# Altium PCB PCB1.PcbDoc
Units mil, origin at the board's own origin, x right, y up, seen from the top; angles counter-clockwise.
Board outline 2070 x 1705.94 mil, 2 copper layers (Top Layer, Bottom Layer); 70 components, 83 nets, 239 pads, 20 vias.
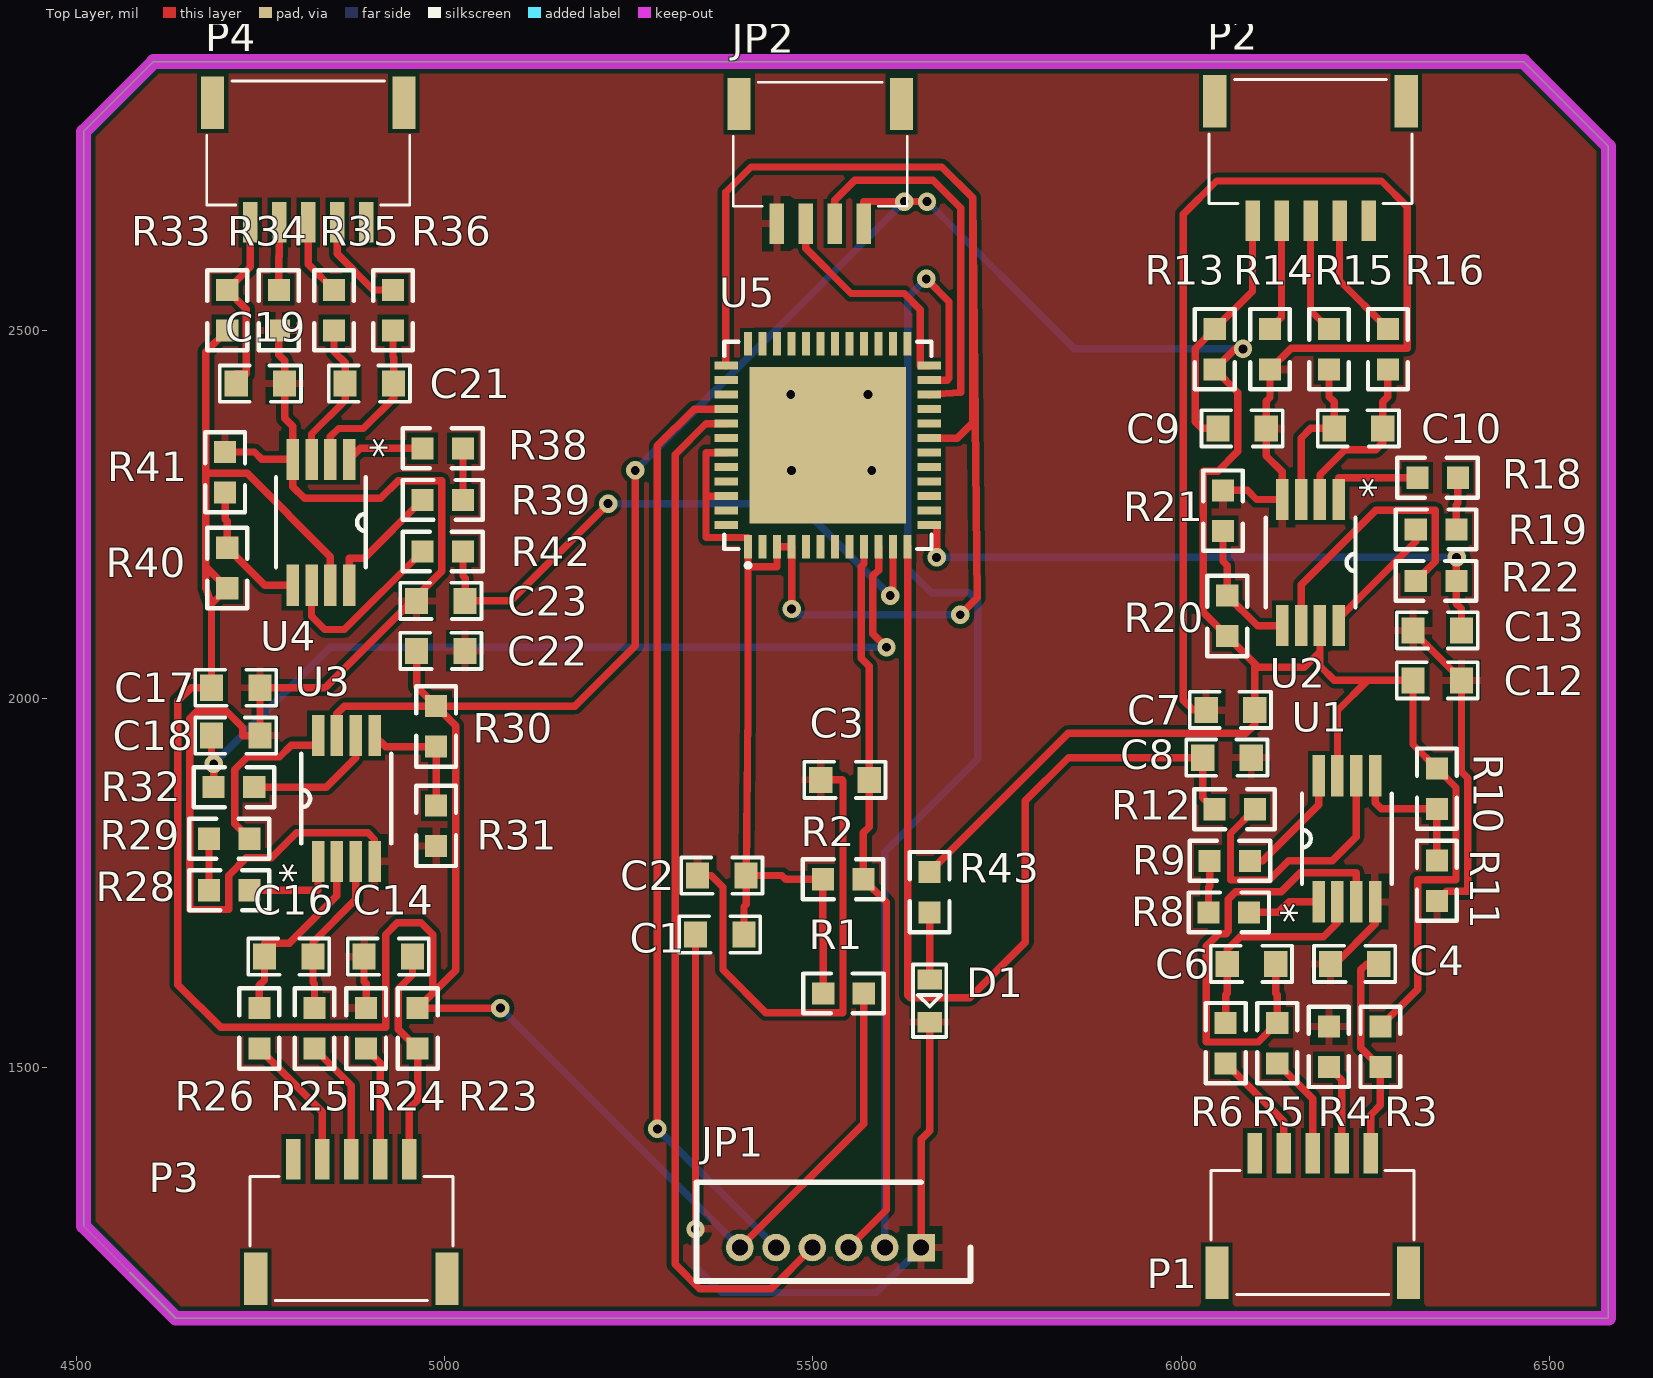
[diagram p0: Top Layer view]
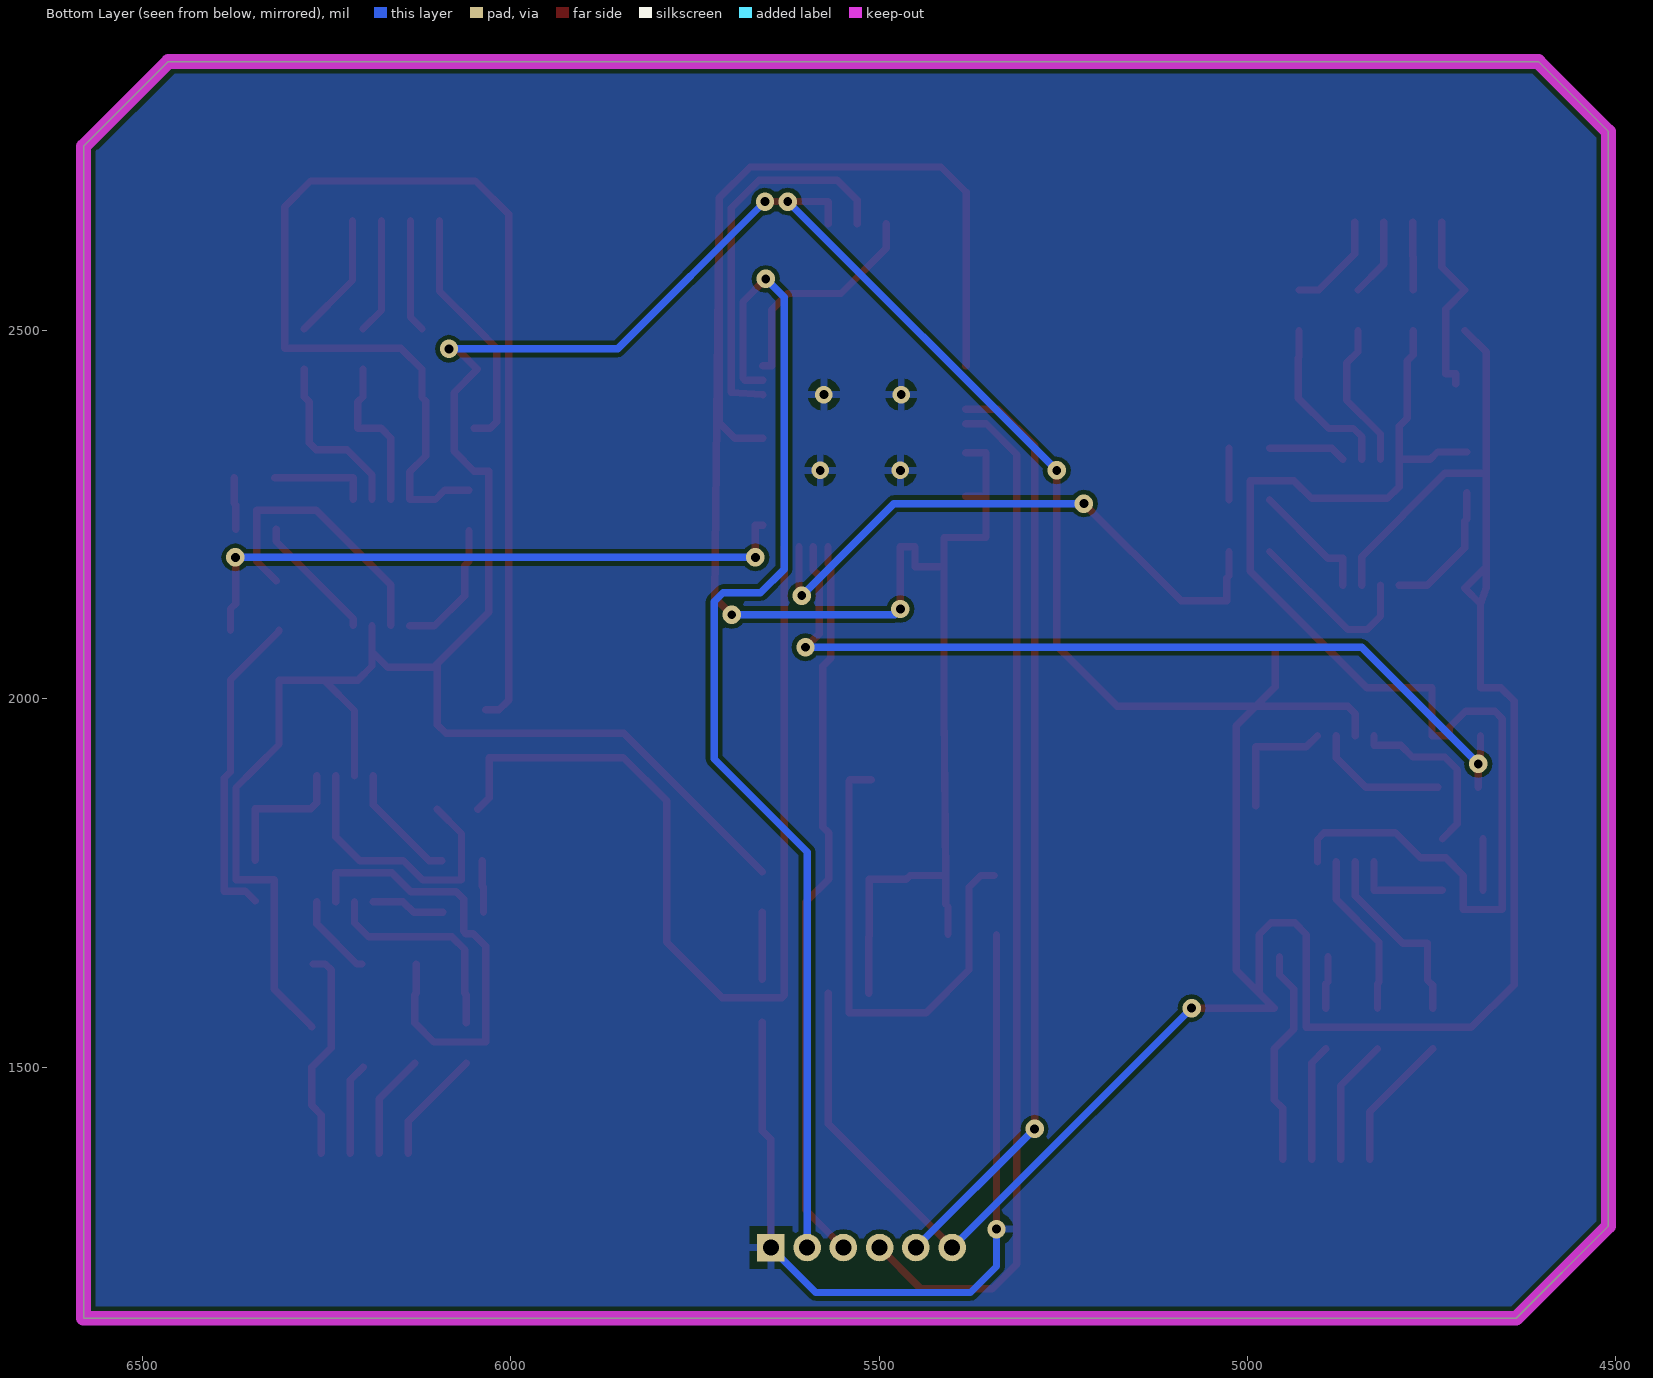
[diagram p1: Bottom Layer view, seen from below]
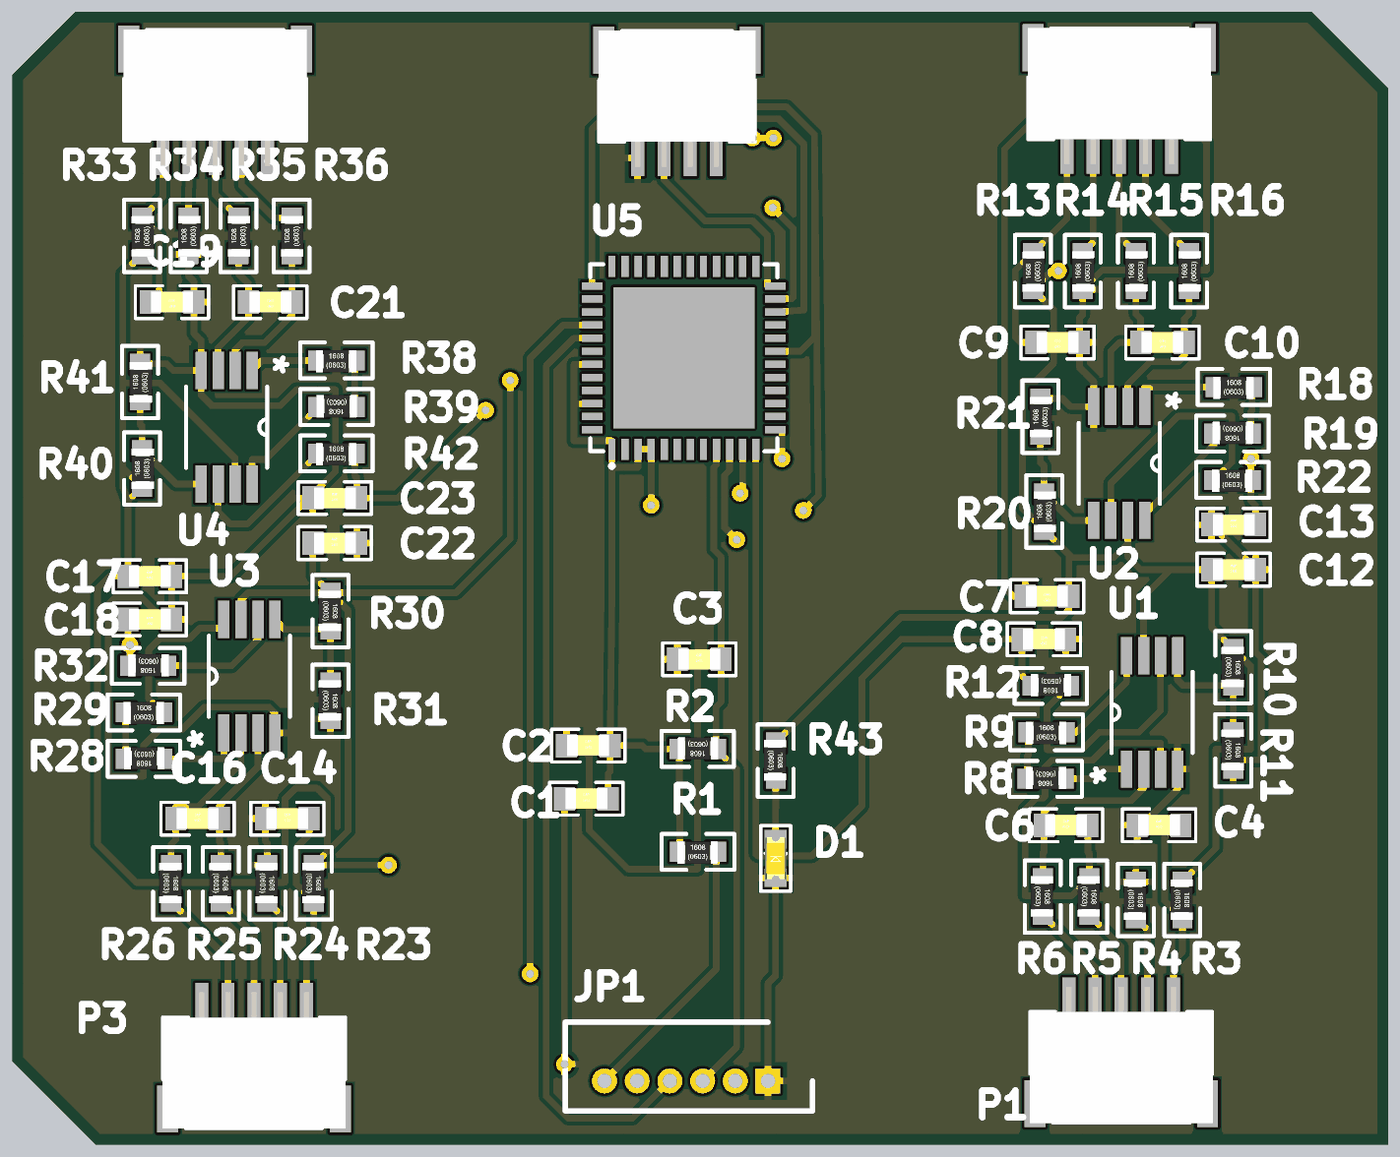
[diagram p2: 3D render of the assembled board from above, using the file's embedded part models]

## Layer stack, top to bottom
Top Solder: solder mask 0.4, Solder Resist, Dk 3.5
Top Layer: signal copper 1.4
Dielectric 1: dielectric 12.6, FR-4, Dk 4.8
Bottom Layer: signal copper 1.4
Bottom Solder: solder mask 0.4, Solder Resist, Dk 3.5

## Board outline
4510,1284.06 4510,1385 4510,2770 4605,2865 6465,2865 6580,2750 6580,1159.06 4635,1159.06

## Design rules (kind name [scope] priority, off if disabled: settings)
Clearance [All] p1: gap=6 ignorepadtopadclearanceinfootprint=FALSE
HoleToHoleClearance [All] p1: gap=0 allowstackedmicrovias=TRUE
MinimumSolderMaskSliver [All] p1: minsoldermaskwidth=0
PolygonConnect [All] p1: connectstyle=Relief reliefconductorwidth=10 reliefentries=4 polygonreliefangle="90 Angle" airgapwidth=10
RoutingVias [All] p1: holewidth=12 width=25 viastyle="Through Hole" minholewidth=6 minwidth=12 maxholewidth=28 maxwidth=50
SilkToSilkClearance [All] p1: silktosilkclearance=0
SilkToSolderMaskClearance [IsPad] p1: minsilkscreentomaskgap=0 clearancetoexposedcopper=TRUE
SolderMaskExpansion [All] p1: expansion=4
Width [All] p1: maxlimit=10 minlimit=10 preferedwidth=10
26 further rules are at their usual default settings.

## Components (designator, comment, footprint, x,y, rotation, side; value= is the part's Value field where it differs from the comment)
C1 "10uF" 0603C 5373.54,1680 r0 top
C2 "100nF" 0603C 5376.44,1760 r0 top
C3 "1uF" 0603C 5543.54,1890 r0 top
C4 "Cb" 0603C 6235.46,1640 r0 top value=0.1uF
C6 "Cb" 0603C 6095.46,1640 r0 top value=1nF
C7 "Cb" 0603C 6066.89,1985 r180 top value=0.1uF
C8 "Cb" 0603C 6062.2,1920 r180 top value=2.2uF
C9 "Cb" 0603C 6082.72,2367.12 r180 top value=0.1uF
C10 "Cb" 0603C 6240.63,2367.12 r180 top value=1nF
C12 "Cb" 0603C 6347.72,2025 r0 top value=0.1uF
C13 "Cb" 0603C 6347.72,2092.87 r0 top value=2.2uF
C14 "Cb" 0603C 4923.54,1650 r0 top value=0.1uF
C16 "Cb" 0603C 4788.54,1650 r0 top value=1nF
C17 "Cb" 0603C 4716.61,2015 r0 top value=0.1uF
C18 "Cb" 0603C 4716.61,1950 r180 top value=2.2uF
C19 "Cb" 0603C 4750,2427.88 r180 top value=0.1uF
C21 "Cb" 0603C 4897.91,2427.88 r180 top value=1nF
C22 "Cb" 0603C 4995,2065 r0 top value=0.1uF
C23 "Cb" 0603C 4995,2132.87 r0 top value=2.2uF
D1 "LED0603" 0603Led 5658.54,1590 r90 top value=Color
JP1 "SPI1" SHDR6 5646.96,1255 r180 top
JP2 "SH_1.0MM_4P" SH_1.0MM_4P 5510.1,2753.27 r0 top
P1 "SH_1.0MM_5P" SH_1.0MM_5P 6178.54,1275 r180 top
P2 "SH_1.0MM_5P" SH_1.0MM_5P 6175.63,2757.12 r0 top
P3 "SH_1.0MM_5P" SH_1.0MM_5P 4873.54,1266.73 r180 top
P4 "SH_1.0MM_5P" SH_1.0MM_5P 4815,2755 r0 top
R1 "0Ω (0R0) ±1%" 0603R 5514.16,1600 r0 top
R2 "10K" 0603R 5568.54,1755 r180 top
R3 "Rb" 0603R 6270.47,1555 r270 top value=0R
R4 "Rb" 0603R 6200.46,1555 r270 top value=0R
R5 "Rb" 0603R 6130.45,1560 r270 top value=0R
R6 "Rb" 0603R 6060.44,1560 r270 top value=0R
R8 "Rb" 0603R 6092.2,1710 r180 top value=51R
R9 "Rb" 0603R 6038.67,1780.01 r0 top value=51R
R10 "Rb" 0603R 6347.2,1905.51 r270 top value=None
R11 "Rb" 0603R 6347.2,1780.5 r270 top value=0R
R12 "Rb" 0603R 6100,1850.02 r180 top value=1K
R13 "Rb" 0603R 6045.63,2447.12 r90 top value=0R
R14 "Rb" 0603R 6120.63,2447.12 r90 top value=0R
R15 "Rb" 0603R 6200.63,2447.12 r90 top value=0R
R16 "Rb" 0603R 6280.63,2447.12 r90 top value=0R
R18 "Rb" 0603R 6320.63,2300 r0 top value=51R
R19 "Rb" 0603R 6373.54,2230 r180 top value=51R
R20 "Rb" 0603R 6062.55,2085 r90 top value=NONE
R21 "Rb" 0603R 6056.89,2227.87 r90 top value=0R
R22 "Rb" 0603R 6318.54,2159.99 r0 top value=1k
R23 "Rb" 0603R 4963.55,1580 r270 top value=0R
R24 "Rb" 0603R 4893.54,1580 r270 top value=0R
R25 "Rb" 0603R 4823.53,1580 r270 top value=0R
R26 "Rb" 0603R 4748.54,1580 r270 top value=0R
R28 "Rb" 0603R 4735.28,1740 r180 top value=51
R29 "Rb" 0603R 4680.28,1810 r0 top value=51
R30 "Rb" 0603R 4988.54,1990 r270 top value=none
R31 "Rb" 0603R 4988.54,1855 r270 top value=0R
R32 "Rb" 0603R 4741.61,1880 r180 top value=1K
R33 "Rb" 0603R 4705,2500 r90 top value=0R
R34 "Rb" 0603R 4775,2500 r90 top value=0R
R35 "Rb" 0603R 4850,2500 r90 top value=0R
R36 "Rb" 0603R 4930,2500 r90 top value=0R
R38 "Rb" 0603R 4970,2340.01 r0 top value=51R
R39 "Rb" 0603R 5025,2270 r180 top value=51R
R40 "Rb" 0603R 4705,2150 r90 top value=NONE
R41 "Rb" 0603R 4702.09,2280 r90 top value=0R
R42 "Rb" 0603R 4970,2199.99 r0 top value=1K
R43 "Rb" 0603R 5658.54,1765 r270 top value=10K
U1 "INA333_DGK_8" VSSOP-8 6225,1810 r90 top value=Value
U2 "INA333_DGK_8" VSSOP-8 6175.63,2185 r270 top value=Value
U3 "INA333_DGK_8" VSSOP-8 4866.61,1864.5 r90 top value=Value
U4 "INA333_DGK_8" VSSOP-8 4832.2,2239.5 r270 top value=Value
U5 "ESP32-PICO-D4" PICO 5520.31,2355 r0 top

## Footprints (in the part's own frame and the unit in brackets; to place one, negate y for a bottom-side part, rotate by r counter-clockwise, add the part's x,y. Pads: shape width x height; smd on the part's side, far side on the other; paste and mask are expansions set on the pad)
0603C [mm]
  rect 0.8x0.9 smd: 1(-0.836,0) 2(0.836,0)
  silkscreen extent -1.4,-0.62 1.4,0.62, body extent -0.8,-0.4 0.8,0.4, height 0.73
0603Led [mm] "0603贴?"
  rect 0.7x0.85 smd: 1(-0.736,0) 2(0.736,0)
  silkscreen extent -1.25,-0.57 1.25,0.58, body extent -0.81,-0.4 0.81,0.4, height 0.62
0603R [mil]
  rect 30x30 smd: 1(0,0) 2(55,0)
  silkscreen extent -27,-27 82,27, body extent -4,-18 58,16, height 18
PICO [mm]
  rect 0.28x0.8 smd: 1(-2.75,-3.778) 2(-2.25,-3.778) 3(-1.75,-3.778) 4(-1.25,-3.778) 5(-0.75,-3.778) 6(-0.25,-3.778) 7(0.25,-3.778) 8(0.75,-3.778) 9(1.25,-3.778) 10(1.75,-3.778) 11(2.25,-3.778) 12(2.75,-3.778) 25(2.75,3.222) 26(2.25,3.222) 27(1.75,3.222) 28(1.25,3.222) 29(0.75,3.222) 30(0.25,3.222) 31(-0.25,3.222) 32(-0.75,3.222) 33(-1.25,3.222) 34(-1.75,3.222) 35(-2.25,3.222) 36(-2.75,3.222)
  rect 0.8x0.28 smd: 13(3.5,-3.027) 14(3.5,-2.527) 15(3.5,-2.027) 16(3.5,-1.527) 17(3.5,-1.027) 18(3.5,-0.527) 19(3.5,-0.027) 20(3.5,0.473) 21(3.5,0.973) 22(3.5,1.473) 23(3.5,1.973) 24(3.5,2.473) 37(-3.5,2.473) 38(-3.5,1.972) 39(-3.5,1.473) 40(-3.5,0.972) 41(-3.5,0.473) 42(-3.5,-0.028) 43(-3.5,-0.527) 44(-3.5,-1.028) 45(-3.5,-1.527) 46(-3.5,-2.028) 47(-3.5,-2.527) 48(-3.5,-3.028)
  rect 5.4x5.4 smd: 49(0,-0.278)
  silkscreen extent -3.58,-4.49 3.58,3.3
SH_1.0MM_4P [mm]
  rect 0.8x1.8 smd: 0(-2.8,1.375) 0(2.8,1.375)
  rect 0.5x1.4 smd: 1(-1.5,-2.75) 2(-0.5,-2.75) 3(0.5,-2.75) 4(1.5,-2.75)
  silkscreen extent -3,-2.15 3,2.13, body extent -3,-3.09 3,2.12, height 3.02
SH_1.0MM_5P [mm]
  rect 0.8x1.8 smd: 0(-3.3,1.375) 0(3.3,1.375)
  rect 0.5x1.4 smd: 1(-2,-2.75) 2(-1,-2.75) 3(0,-2.75) 4(1,-2.75) 5(2,-2.75)
  silkscreen extent -3.5,-2.15 3.5,2.13, body extent -3.5,-3.09 3.5,2.13, height 3.02
SHDR6 [mm]
  rect 0.95x0.95 hole 0.55: 1(0,0)
  round 0.95 hole 0.55: 2(1.25,0) 3(2.5,0) 4(3.75,0) 5(5,0) 6(6.25,0)
  silkscreen extent -1.7,-2.25 7.75,1.15
VSSOP-8 [mil]
  rect 56x17 smd: 1(-85.5,38.39) 2(-85.5,12.8) 3(-85.5,-12.8) 4(-85.5,-38.39) 5(85.5,-38.39) 6(85.5,-12.8) 7(85.5,12.8) 8(85.5,38.39)
  silkscreen extent -61,-61 61,61

## Part data
C1: SuppliersPartNumber=C19702, ComponentLink1Description=供应商链接, ComponentLink1URL=http://www.szlcsc.com/product/details_20411.html, Supplier=LC
C2: SuppliersPartNumber=C14663, ComponentLink1Description=供应商链接, ComponentLink1URL=http://www.szlcsc.com/product/details_15331.html, Supplier=LC
C3: SuppliersPartNumber=C15849, ComponentLink1Description=供应商链接, ComponentLink1URL=http://www.szlcsc.com/product/details_16531.html, Supplier=LC
C4 C6 C7 C8 C9 C10 C12 C13 C14 C16 C17 C18 C19 C21 C22 C23: library part Cap0603
JP1: library part "HEADER 6"
R1: SuppliersPartNumber=C21189, ComponentLink1Description=供应商链接, ComponentLink1URL=http://www.szlcsc.com/product/details_21903.html, Supplier=LC
R2: SuppliersPartNumber=C25804, ComponentLink1Description=供应商链接, ComponentLink1URL=http://www.szlcsc.com/product/details_26547.html, Supplier=LC
R3 R4 R5 R6 R8 R9 R10 R11 R12 R13 R14 R15 R16 R18 R19 R20 R21 R22 R23 R24 R25 R26 R28 R29 R30 R31 R32 R33 R34 R35 R36 R38 R39 R40 R41 R42 R43: library part Res0603
U1 U2 U3 U4: "Imported", Manufacturer="Texas Instruments", Manufacturer_Part_Number=ina333_dgk_8, PACKAGE_DESIGNATOR=DGK, Datasheet URL=http://www.ti.com/lit/gpn/INA333, FAMILY_NAME="SINGLE SUPPLY", GENERIC_PART_NUMBER=INA333, INDUSTRY_STD_PKG_TYPE=MSOP, PIN_COUNT=8, RefDes=RefDes, Type=DEV, Vendor="Texas Instruments"
JP2 P1 P2 P3 P4: LatestRevisionDate=17-Jul-2002, LatestRevisionNote="Re-released for DXP Platform.", Publisher="Altium Limited"

## Via types
v1: diameter 25, hole 12, Top Layer to Bottom Layer, 16 vias
v2: diameter 23.62/23.62 (per signal layer), hole 12, Top Layer to Bottom Layer, 4 vias

## Nets (pads, with @x,y where several pads share a name; then routed paths per layer and width w, separated by ;. In a path a pad name is that pad's centre, name@x,y a point inside that pad or via, vN(x,y) a via of type N, cw(c..) or ccw(c..) an arc to the next point about the centre after c; other vN are vias at no path point)
EN: C3.2 JP1.3 R2.1 U5.9 | length 995.1
  Top Layer w10: JP1.3 5600,1306.46 5600,1723.54 R2.1 5568.54,1818 5576.44,1825.91 C3.2 5576.44,2044 5565.5,2054.94 5565.5,2179.5 5569.53,2183.53 U5.9
FLASH_CLK: U5.31
FLASH_CS: U5.25
FLASH_SD0: U5.27
FLASH_SD1: U5.33
FLASH_SD2: U5.30
FLASH_SD3: U5.32
GND: C1.1 C2.1 C3.1 C4.1 C7.2 C8.1 C9.1 C12.2 C13.1 C14.1 C17.2 C18.1 C19.1 C22.2 C23.1 D1.1 JP1.1 JP2.1 R4.1 R11.2 R14.1 R21.2 R24.1 R31.2 R34.1 R41.2 U1.4 U2.4 U3.4 U4.4 U5.49 | length 5875.7
  Top Layer w10: R41.2 4742,2335 4752,2325 U4.4 ; R34.1 4775,2466.91 4782.91,2459 C19.1 4782.91,2380.91 4793.82,2370 U4.4 ; C14.1 4890.63,1615.91 4893.54,1613 R24.1 ; U3.4 4905,1809 4896,1818 4799,1818 4765,1784 4731,1784 4707,1760 4707,1714 4654,1714 4654,1973 4664,1983 4704,1983 4726,1961 4726,1950 C18.1 C17.2 4838,2015 4996,2173 4996,2296 4937,2296 4913,2272 4809.82,2272 4793.82,2288 U4.4 ; v1(5340.63,1280) C1.1 ; C2.1 5362,1760 5378,1744 5378,1632 5436,1574 5541,1574 5541,1889 5540,1890 C3.1 ; JP1.1 5646.96,1402 5658.53,1413.57 D1.1 ; C7.2 6016,1985 6003,1998 6003,2658 6048,2703 6272,2703 6307,2668 6307,2476 6149.51,2476 R14.1 6120.63,2409 6115.63,2404 C9.1 6115.63,2329.61 6137.24,2308 U2.4 6102.37,2270.5 6090,2282.87 R21.2 ; C4.1 6209,1640 6263.39,1694.39 U1.4 ; C13.1 6314.82,2091.81 6380.63,2026 C12.2 6380.63,1901.08 6389.2,1892.51 6389.2,1738.5 6360.2,1738.5 R11.2
  Bottom Layer w10: v1(5340.63,1280) 5340.63,1229.37 5376,1194 5585.96,1194 JP1.1
  other v2: 5471.11,2310 5580,2310 5470,2412.98 5575,2412.98
GPIO0: JP1.2 U5.23 | length 1622.4
  Top Layer w10: v1(5654,2570) 5684.86,2539.14 5684.86,2435 5682.51,2432.66 U5.23
  Bottom Layer w10: JP1.2 5597.75,1792 5724,1918.25 5724,2132 5712,2144 5661,2144 5629,2176 5629,2545 v1(5654,2570)
GPIO2: JP2.3 U5.22 | length 523.1
  Top Layer w10: JP2.3 5529.79,2677 5556.79,2704 5663.11,2704 5700.86,2666.25 5700.86,2415.86 U5.22
GPIO4: JP2.2 U5.24 | length 311.4
  Top Layer w10: JP2.2 5490.42,2611.58 5551.87,2550.13 5623.87,2550.13 5646,2528 5646,2452.35 U5.24
GPIO5: U5.34
GPIO9: U5.28
GPIO10: U5.29
GPIO12: U5.18
GPIO13: U5.20
GPIO14: U5.17
GPIO15: U5.21
GPIO18: U5.35
GPIO19: U5.38
GPIO21: U5.42
GPIO22: U5.39
GPIO23: U5.36
GPIO25: U5.14
GPIO26: U5.15
GPIO27: U5.16
GPIO32: C8.2 R12.2 U5.12 | length 1335
  Top Layer w10: U5.12 5628.59,1597.41 5632,1594 5713,1594 5788.39,1669.39 5788.39,1861.39 5847,1920 C8.2 6029.3,1865.72 R12.2
GPIO33: C13.2 R22.2 U5.13 | length 862
  Top Layer w10: U5.13 5668,2235.81 v1(5668,2192) ; v1(6374,2192) 6373.54,2191.54 R22.2 6373.54,2129.09 6380.63,2122 C13.2
  Bottom Layer w10: v1(5668,2192) v1(6374,2192)
GPIO34: C18.2 R32.2 U5.10 | length 1197.3
  Top Layer w10: C18.2 4683.71,1915.91 4686.61,1913 v1(4686.61,1911.61) R32.2 ; U5.10 5589.22,2174.72 5581.5,2167 5581.5,2088.5 v1(5600,2070)
  Bottom Layer w10: v1(4686.61,1911.61) 4845,2070 v1(5600,2070)
GPIO35: C23.2 R42.2 U5.11 | length 819.8
  Top Layer w10: R42.2 5025,2166.91 5027.91,2164 C23.2 5089.87,2132.87 v1(5222,2265) ; v1(5605,2140) 5608.9,2143.9 U5.11
  Bottom Layer w10: v1(5222,2265) 5480,2265 v1(5605,2140)
GPIO37: U5.7
GPIO38: U5.6
NetC4_2: C4.2 P1.1 R3.2 | length 292.8
  Top Layer w10: P1.1 6257.28,1435 6270.47,1448.19 R3.2 6244,1526.47 6244,1632 6252,1640 C4.2
NetC6_1: C6.1 R6.1 U1.2 | length 293.7
  Top Layer w10: R6.1 6060.44,1598 6062.55,1600.11 C6.1 6062.55,1659.55 6080,1677 6193.2,1677 6212.2,1696 U1.2
NetC6_2: C6.2 R5.1 U1.3 | length 628.6
  Top Layer w10: C6.2 6128.36,1600.08 6130.45,1598 R5.1 6104.45,1534 6034,1534 6034,1664 6051,1681 6061,1681 6064,1684 6064,1728 6074.01,1738.01 6135.67,1738.01 6161.66,1764 6237.8,1764 U1.3
NetC9_2: C9.2 P2.1 R13.2 | length 339.6
  Top Layer w10: C9.2 6027.88,2367.12 6019,2376 6019,2475.49 R13.2 6096.89,2553.38 P2.1
NetC10_1: C10.1 R16.1 U2.2 | length 239.2
  Top Layer w10: U2.2 6188.43,2304 6222.43,2338 6264,2338 6273.54,2347.54 C10.1 6273.54,2403 6280.63,2410.09 R16.1
NetC10_2: C10.2 R15.1 U2.3 | length 216.7
  Top Layer w10: U2.3 6162.83,2353.95 6176,2367.12 C10.2 6207.72,2403 6200.63,2410.09 R15.1
NetC14_2: C14.2 P3.1 R23.2 | length 298.7
  Top Layer w10: P3.1 4952.28,1444 4963.55,1455.27 R23.2 4937,1551.55 4937,1606 4956.44,1625.44 C14.2
NetC16_1: C16.1 R26.1 U3.2 | length 262.2
  Top Layer w10: R26.1 4748.54,1611 4755.63,1618.09 C16.1 4755.63,1668 4789,1668 4853.82,1732.82 U3.2
NetC16_2: C16.2 R25.1 U3.3 | length 223.9
  Top Layer w10: R25.1 4823.53,1613 4821.44,1615.08 C16.2 4821.44,1669.66 4879.41,1727.63 U3.3
NetC19_2: C19.2 P4.1 R33.2 | length 256.5
  Top Layer w10: C19.2 4717.09,2441 4731,2441 4731,2529 R33.2 4736.26,2586.26 P4.1
NetC21_1: C21.1 R36.1 U4.2 | length 230.7
  Top Layer w10: U4.2 4845,2356 4856,2367 4889.81,2367 4930.81,2408 C21.1 4930.81,2463 4930,2463.81 R36.1
NetC21_2: C21.2 R35.1 U4.3 | length 200.1
  Top Layer w10: U4.3 4819.41,2359.41 4865,2405 C21.2 4865,2456 4850,2471 R35.1
NetD1_2: D1.2 R43.2 | length 91
  Top Layer w10: D1.2 5658.53,1664 R43.2
NetP1_2: P1.2 R4.2 | length 124
  Top Layer w10: R4.2 6217.91,1482.55 P1.2
NetP1_3: P1.3 R5.2 | length 141.7
  Top Layer w10: R5.2 6178.54,1456.91 P1.3
NetP1_4: P1.4 R6.2 | length 154.3
  Top Layer w10: R6.2 6139.17,1426.27 P1.4
NetP2_2: P2.2 R14.2 | length 153.2
  Top Layer w10: R14.2 6136.26,2517.75 P2.2
NetP2_3: P2.3 R15.2 | length 157.1
  Top Layer w10: P2.3 6175.63,2527.12 R15.2
NetP2_4: P2.4 R16.2 | length 173.9
  Top Layer w10: P2.4 6215,2567.75 R16.2
NetP3_2: P3.2 R24.2 | length 158
  Top Layer w10: R24.2 4912.91,1505.63 P3.2
NetP3_3: P3.3 R25.2 | length 170.7
  Top Layer w10: R25.2 4873.54,1474.99 P3.3
NetP3_4: P3.4 R26.2 | length 185.5
  Top Layer w10: R26.2 4834.17,1439.37 P3.4
NetP4_2: P4.2 R34.2 | length 92
  Top Layer w10: R34.2 4775,2600 4775.63,2600.63 P4.2
NetP4_3: P4.3 R35.2 | length 106.2
  Top Layer w10: P4.3 4815,2590 R35.2
NetP4_4: P4.4 R36.2 | length 138.7
  Top Layer w10: P4.4 4854.37,2604 4903.37,2555 R36.2
NetR8_1: R8.1 U1.1 | length 100.4
  Top Layer w10: R8.1 6132,1710 6146.5,1724.5 U1.1
NetR8_2: R8.2 R9.1 | length 70.6
  Top Layer w10: R8.2 6037.2,1744 6038.67,1745.46 R9.1
NetR9_2: R9.2 U1.8 | length 163.9
  Top Layer w10: R9.2 6110.62,1780.01 6186.61,1856 U1.8
NetR10_2: R10.2 R11.1 U1.5 | length 194.1
  Top Layer w10: U1.5 6263.39,1858.61 6271.49,1850.51 R10.2 R11.1
NetR12_1: R12.1 U1.6 | length 387.5
  Top Layer w10: R12.1 6067,1817.02 6067,1754.01 6119.67,1754.01 6145.66,1780 6205,1780 6237.8,1812.8 U1.6
NetR18_1: R18.1 U2.1 | length 136.1
  Top Layer w10: U2.1 6214.02,2300 R18.1
NetR18_2: R18.2 R19.1 | length 70.9
  Top Layer w10: R19.1 6373.54,2263 6375.63,2265.09 R18.2
NetR19_2: R19.2 U2.8 | length 173.8
  Top Layer w10: U2.8 6214.02,2109 6318.54,2213.52 R19.2
NetR20_2: R20.2 R21.1 U2.5 | length 182.4
  Top Layer w10: R21.1 6056.89,2186.66 6062.55,2181 R20.2 6103.55,2099 6137.24,2099 U2.5
NetR22_1: R22.1 U2.6 | length 386.4
  Top Layer w10: U2.6 6162.83,2154.83 6264,2256 6345,2256 6345,2186.45 R22.1
NetR28_1: R28.1 U3.1 | length 131.9
  Top Layer w10: R28.1 4828.23,1740 U3.1
NetR28_2: R28.2 R29.1 | length 70
  Top Layer w10: R28.2 R29.1
NetR29_2: R29.2 U3.8 | length 242.3
  Top Layer w10: R29.2 4715,1830.28 4715,1904 4732,1921 4776,1921 4792,1937 4828.23,1937 U3.8
NetR30_2: R30.2 R31.1 U3.5 | length 169.7
  Top Layer w10: U3.5 4920,1935 R30.2 R31.1
NetR32_1: R32.1 U3.6 | length 184.4
  Top Layer w10: R32.1 4839.41,1880 4879.41,1920 U3.6
NetR38_1: R38.1 U4.1 | length 105.6
  Top Layer w10: U4.1 4885.6,2340.01 R38.1
NetR38_2: R38.2 R39.1 | length 70
  Top Layer w10: R39.1 R38.2
NetR39_2: R39.2 U4.8 | length 169.1
  Top Layer w10: U4.8 4870.59,2191 4891,2191 R39.2
NetR40_2: R40.2 R41.1 U4.5 | length 186.1
  Top Layer w10: R41.1 4702.09,2243.91 4705,2241 R40.2 4756,2154 U4.5
NetR42_1: R42.1 U4.6 | length 243.9
  Top Layer w10: U4.6 4819.41,2112 4837.41,2094 4864.01,2094 R42.1
RXD: JP1.5 U5.40 | length 1269.3
  Top Layer w10: v1(5289,1416.11) 5289,2343.29 5339,2393.29 U5.40
  Bottom Layer w10: v1(5289,1416.11) JP1.5
SENSOR_VN: U5.8
SENSOR_VP: U5.5
TXD: JP1.4 U5.41 | length 1409.6
  Top Layer w10: U5.41 5355,2373.61 5313,2331.61 5313,1232.17 5346.17,1199 5443.32,1199 JP1.4
VDD3V3: C7.1 C12.1 C17.1 C22.1 JP1.6 JP2.4 R1.2 R3.1 R10.1 R13.1 R20.1 R23.1 R30.1 R33.1 R40.1 R43.1 U1.7 U2.7 U3.7 U4.7 | length 7353.1
  Top Layer w10: R33.1 4676,2471 4676,2306 ; U4.7 4845,2193 4732,2306 4676,2306 ; U3.7 4853.82,1979.82 4864,1990 R30.1 ; C22.1 4962.09,2016.44 R30.1 ; v1(5075.9,1580) R23.1 4984,1600.45 ; v1(5259,2310) 5259,2072 5177,1990 R30.1 ; JP1.6 5569.16,1423.26 R1.2 ; JP2.4 5569.16,2675 v1(5624,2675) v1(5655,2675) ; R43.1 5846.54,1953 6088,1953 6099.8,1964.8 C7.1 6099.8,2047.76 ; v1(6084,2475) 6073.51,2475 R13.1 6077,2415.75 6077,2336 6050,2309 6030,2309 6030,2117.55 R20.1 6099.8,2047.76 ; U2.7 6188.43,2064 ; U1.7 6212.2,1984 6253.2,2025 ; R3.1 6321,1605.53 6321,1754.5 6373.2,1754.5 6373.2,1879.51 R10.1 6314.82,1937.9 C12.1 6253.2,2025 ; 4676,2179 4676,2306 ; 4676,2179 4676,2150 4683.71,2128.71 ; 4676,2179 R40.1 4683.71,2128.71 ; 4683.71,2128.71 C17.1 4656,2015 4638,1997 4638,1612 4696,1554 4920,1554 4920,1680 4936,1696 4968,1696 4984,1680 4984,1600.45 ; 4984,1600.45 5015,1631.45 5015,1963.54 R30.1 ; 6099.8,2047.76 6104.55,2043 6167.43,2043 6188.43,2064 ; 6188.43,2064 6188.43,2044.57 6208,2025 6253.2,2025
  Bottom Layer w10: v1(5075.9,1580) JP1.6 ; v1(5259,2310) v1(5624,2675) ; v1(5655,2675) 5855,2475 v1(6084,2475)
VDD33: C1.2 C2.2 R1.1 R2.2 U5.1 U5.3 U5.4 U5.19 U5.37 U5.43 U5.46 | length 2982.7
  Top Layer w10: U5.46 5355,2275.18 ; U5.43 5355,2334.24 5355,2275.18 ; U5.37 5382,2452.35 5382,2688 5416,2722 5675,2722 5716.86,2680.14 ; C1.2 5406.44,1718 5409.35,1720.91 C2.2 ; 5461,2206.27 U5.3 5451.42,2179 5412.05,2179 ; 5461.01,2206.28 U5.4 v1(5471.11,2121.93) ; R1.1 5514.16,1677 5513.54,1677.62 R2.2 5463,1755 5458,1760 C2.2 ; U5.19 5696,2353.92 5716.86,2374.77 5716.86,2680.14 ; v1(5700.11,2114.11) 5723,2137 5716.86,2680.14 ; 5355,2275.18 5355,2219 5412.05,2219 U5.1 5412.05,2179 ; C2.2 5412.05,1986.4 5412.05,2179
  Bottom Layer w10: v1(5471.11,2121.93) 5478.93,2114.11 v1(5700.11,2114.11)
pads on no net: JP2.0 P1.0 P1.5 P2.0 P2.5 P3.0 P3.5 P4.0 P4.5 U5.2 U5.26 U5.44 U5.45 U5.47 U5.48

## Polygon pours and split planes (outlines as drawn)
GND on Bottom Layer "Bottom Layer-GND 1" (solid, remove dead copper, pour order 5): 4615,2850 4525,2760 4505,2760 4505,1289.06 4634.06,1160 6560,1160 6575,1175 6570,1180 6570,2745 6560,2745 6435,2870
GND on Top Layer "Top Layer-GND" (solid, remove dead copper, pour order 3): 4610,2855 4520,2765 4495,2765 4495,1305 4635,1165 6565,1165 6575,1175 6565,1185 6565,2752.5 6452.5,2865

## Keep-outs
Keep-Out Layer:
  lines w20: 4510,1284.06 4635,1159.06 6580,1159.06 6580,2750 6465,2865 6440,2865 4605,2865 4510,2770 4510,1385 4510,1284.06

## Text inside footprints (layer, text, board x,y; h text height)
U1: Top Overlay "*" at 6175,1695 h40 r90
U2: Top Overlay "*" at 6225.63,2300 h40 r270
U3: Top Overlay "*" at 4816.61,1749.5 h40 r90
U4: Top Overlay "*" at 4882.2,2354.5 h40 r270